# Altium PCB PCB2.PcbDoc
Units mm, origin at the board's own origin, x right, y up, seen from the top; angles counter-clockwise.
Board outline 152.4 x 101.6 mm, 2 copper layers (Top Layer, Bottom Layer); 93 components, 79 nets, 348 pads, 0 vias.
Unrouted connection lines stored in the file: 165.
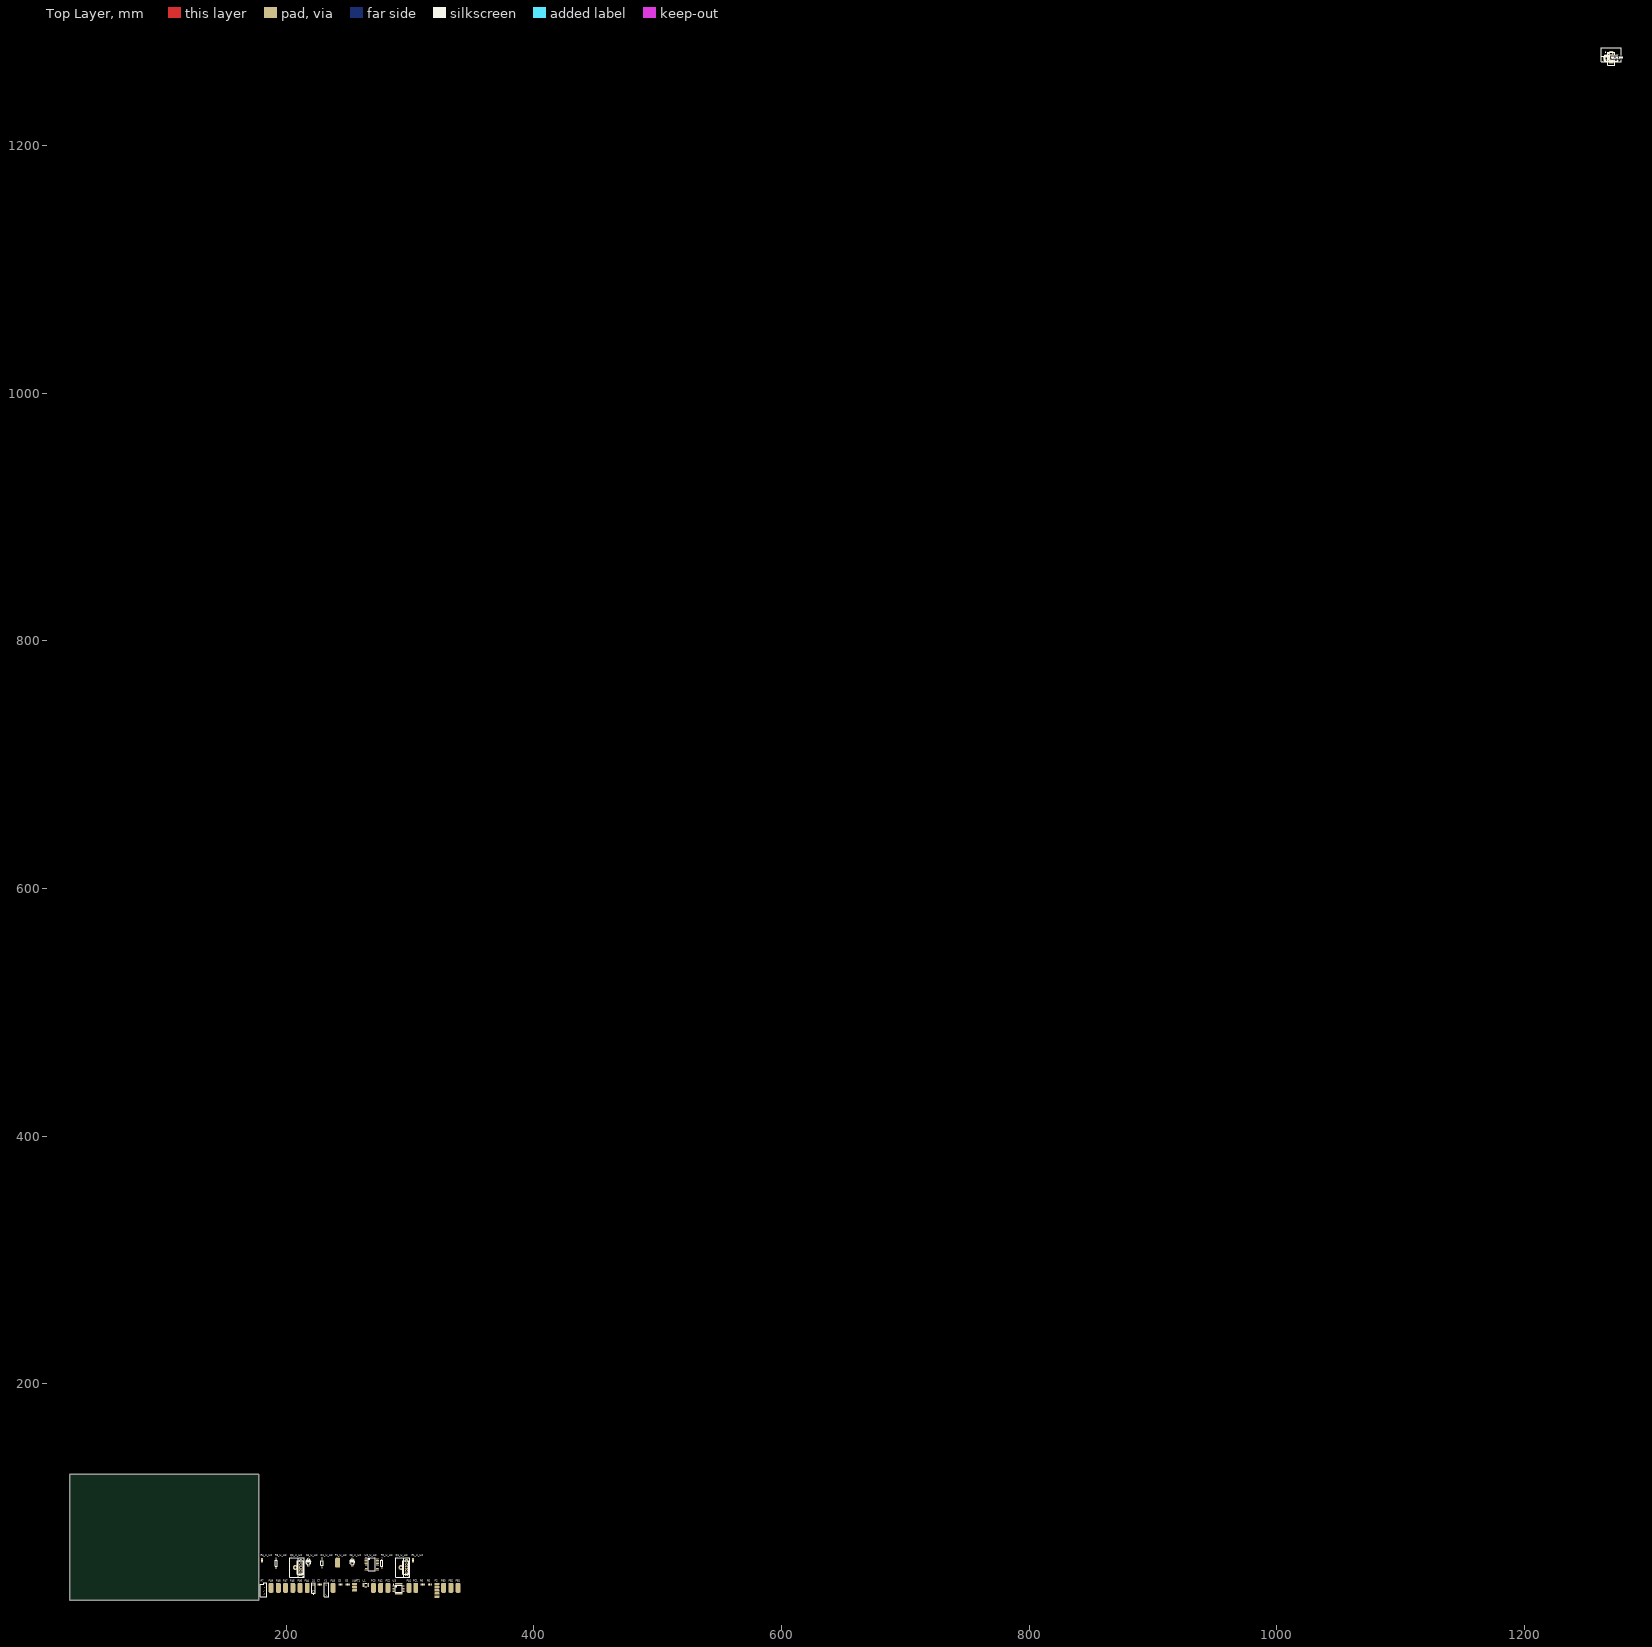
[diagram p0: Top Layer view]
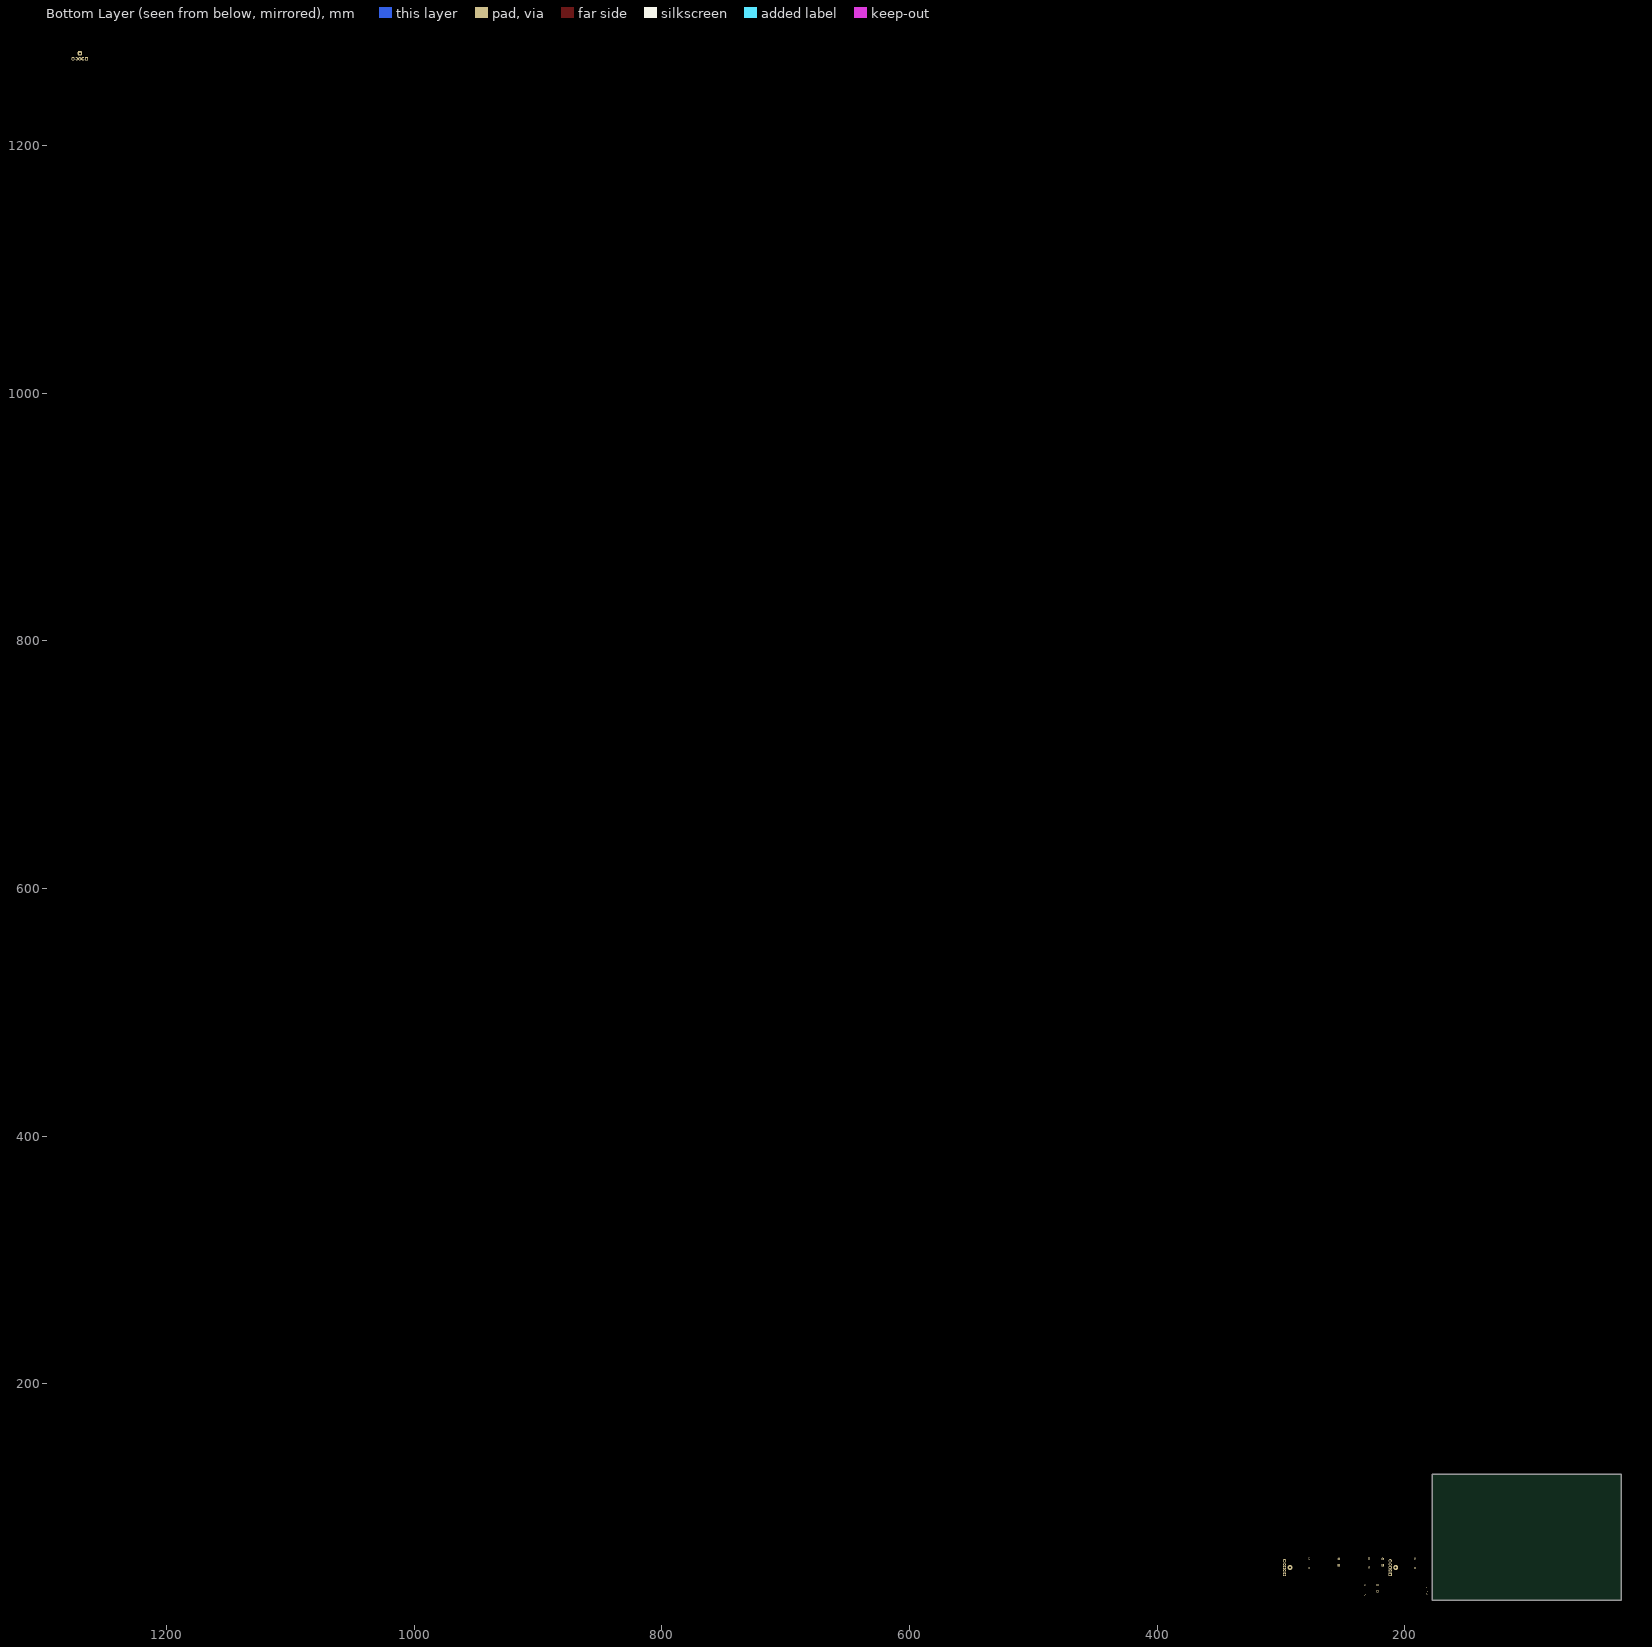
[diagram p1: Bottom Layer view, seen from below]

## Layer stack, top to bottom
Top Solder: solder mask 0.0102, Solder Resist, Dk 3.5
Top Layer: signal copper 0.0356
Dielectric 1: dielectric 0.32, FR-4, Dk 4.8
Bottom Layer: signal copper 0.0356
Bottom Solder: solder mask 0.0102, Solder Resist, Dk 3.5

## Board outline
25.4,25.4 177.8,25.4 177.8,127 25.4,127

## Design rules (kind name [scope] priority, off if disabled: settings)
Clearance [All] p1: gap=0.254
PolygonConnect [All] p1: connectstyle=Relief reliefconductorwidth=0.254 reliefentries=4 polygonreliefangle="90 Angle" airgapwidth=0.254
RoomDefinition U_H6 [InComponentClass('U_H6')] p1: confinementstyle=ConfineIn formatcopy=TRUE lockcomponents=FALSE outline 1261.745,1264.285 1280.541,1264.285 1280.541,1279.017 1261.745,1279.017
RoomDefinition U_H5 [InComponentClass('U_H5')] p2: confinementstyle=ConfineIn formatcopy=TRUE lockcomponents=FALSE outline 1261.745,1264.285 1280.541,1264.285 1280.541,1279.017 1261.745,1279.017
RoomDefinition U_H4 [InComponentClass('U_H4')] p3: confinementstyle=ConfineIn formatcopy=TRUE lockcomponents=FALSE outline 1261.745,1264.285 1280.541,1264.285 1280.541,1279.017 1261.745,1279.017
RoomDefinition U_H3 [InComponentClass('U_H3')] p4: confinementstyle=ConfineIn formatcopy=TRUE lockcomponents=FALSE outline 1261.745,1264.285 1280.541,1264.285 1280.541,1279.017 1261.745,1279.017
RoomDefinition U_H2 [InComponentClass('U_H2')] p5: confinementstyle=ConfineIn formatcopy=TRUE lockcomponents=FALSE outline 178.943,43.434 311.785,43.434 311.785,62.738 178.943,62.738
RoomDefinition U_H1 [InComponentClass('U_H1')] p6: confinementstyle=ConfineIn formatcopy=TRUE lockcomponents=FALSE outline 1261.745,1264.285 1280.033,1264.285 1280.033,1279.017 1261.745,1279.017
RoomDefinition Main [InComponentClass('Main')] p7: confinementstyle=ConfineIn formatcopy=TRUE lockcomponents=FALSE outline 178.943,26.924 341.122,26.924 341.122,42.164 178.943,42.164
RoutingVias [All] p1: holewidth=0.711 width=1.27 viastyle="Through Hole" minholewidth=0.711 minwidth=1.27 maxholewidth=0.711 maxwidth=1.27
SolderMaskExpansion [All] p1: expansion=0.102
Width [All] p1: maxlimit=0.254 minlimit=0.254 preferedwidth=0.254
30 further rules are at their usual default settings.

## Classes and differential pairs
channel class H: U_H1 U_H2 U_H3 U_H4 U_H5 U_H6
component class U_H6: C3_U_H6 C4_U_H6 D1_U_H6 P1_U_H6 Q1_U_H6 Q2_U_H6 R1_U_H6 R2_U_H6 R3_U_H6 R4_U_H6 U2_U_H6
component class U_H5: C3_U_H5 C4_U_H5 D1_U_H5 P1_U_H5 Q1_U_H5 Q2_U_H5 R1_U_H5 R2_U_H5 R3_U_H5 R4_U_H5 U2_U_H5
component class U_H4: C3_U_H4 C4_U_H4 D1_U_H4 P1_U_H4 Q1_U_H4 Q2_U_H4 R1_U_H4 R2_U_H4 R3_U_H4 R4_U_H4 U2_U_H4
component class U_H3: C3_U_H3 C4_U_H3 D1_U_H3 P1_U_H3 Q1_U_H3 Q2_U_H3 R1_U_H3 R2_U_H3 R3_U_H3 R4_U_H3 U2_U_H3
component class U_H2: C3_U_H2 C4_U_H2 D1_U_H2 P1_U_H2 Q1_U_H2 Q2_U_H2 R1_U_H2 R2_U_H2 R3_U_H2 R4_U_H2 U2_U_H2
component class U_H1: C3_U_H1 C4_U_H1 D1_U_H1 P1_U_H1 Q1_U_H1 Q2_U_H1 R1_U_H1 R2_U_H1 R3_U_H1 R4_U_H1 U2_U_H1
component class Main: C5 C6 C7 L1 P2 PA1 PA2 PA3 PA4 PA5 PA6 PA7 PA8 PA9 PB1 PB2 PB3 PC1 PC2 PC3 R5 R6 R7 S1 U3 UART1 Y1

## Components (designator, comment, footprint, x,y, rotation, side; value= is the part's Value field where it differs from the comment)
C3_U_H1 "Cap Pol1" CAPR-Small 1269.987,1269.987 r0 top (schematic designator C3)
C3_U_H2 "Cap Pol1" CAPR-Small 253.238,56.134 r90 top (schematic designator C3)
C3_U_H3 "Cap Pol1" CAPR-Small 1269.987,1269.987 r0 top (schematic designator C3)
C3_U_H4 "Cap Pol1" CAPR-Small 1269.987,1269.987 r0 top (schematic designator C3)
C3_U_H5 "Cap Pol1" CAPR-Small 1269.987,1269.987 r0 top (schematic designator C3)
C3_U_H6 "Cap Pol1" CAPR-Small 1269.987,1269.987 r0 top (schematic designator C3)
C4_U_H1 "Cap Pol1" CAPR-Small 1269.987,1269.987 r0 top (schematic designator C4)
C4_U_H2 "Cap Pol1" CAPR-Small 217.932,56.134 r90 top (schematic designator C4)
C4_U_H3 "Cap Pol1" CAPR-Small 1269.987,1269.987 r0 top (schematic designator C4)
C4_U_H4 "Cap Pol1" CAPR-Small 1269.987,1269.987 r0 top (schematic designator C4)
C4_U_H5 "Cap Pol1" CAPR-Small 1269.987,1269.987 r0 top (schematic designator C4)
C4_U_H6 "Cap Pol1" CAPR-Small 1269.987,1269.987 r0 top (schematic designator C4)
C5 "Cap" 6-0805_M 243.967,38.1 r0 top
C6 "Cap" 6-0805_M 249.682,38.1 r0 top
C7 "Cap" 6-0805_M 227.076,38.1 r0 top
D1_U_H1 "Diode 15822" DO-35 1269.987,1269.987 r0 top (schematic designator D1)
D1_U_H2 "Diode 15822" DO-35 228.854,55.372 r90 top (schematic designator D1)
D1_U_H3 "Diode 15822" DO-35 1269.987,1269.987 r0 top (schematic designator D1)
D1_U_H4 "Diode 15822" DO-35 1269.987,1269.987 r0 top (schematic designator D1)
D1_U_H5 "Diode 15822" DO-35 1269.987,1269.987 r0 top (schematic designator D1)
D1_U_H6 "Diode 15822" DO-35 1269.987,1269.987 r0 top (schematic designator D1)
L1 "Inductor" INDC4532 264.414,37.592 r0 top
P1_U_H1 "Header TOP 1" PIN1 1269.987,1269.987 r0 top (schematic designator P1)
P1_U_H2 "Header TOP 1" PIN1 241.554,55.626 r0 top (schematic designator P1)
P1_U_H3 "Header TOP 1" PIN1 1269.987,1269.987 r0 top (schematic designator P1)
P1_U_H4 "Header TOP 1" PIN1 1269.987,1269.987 r0 top (schematic designator P1)
P1_U_H5 "Header TOP 1" PIN1 1269.987,1269.987 r0 top (schematic designator P1)
P1_U_H6 "Header TOP 1" PIN1 1269.987,1269.987 r0 top (schematic designator P1)
P2 "Header TOP 5" PIN_TOP_SMALL_5 321.691,28.194 r90 top
PA1 "Header TOP 1" PIN1 299.212,35.306 r0 top
PA2 "Header TOP 1" PIN1 276.352,35.306 r0 top
PA3 "Header TOP 1" PIN1 237.871,35.306 r0 top
PA4 "Header TOP 1" PIN1 217.043,35.306 r0 top
PA5 "Header TOP 1" PIN1 205.359,35.306 r0 top
PA6 "Header TOP 1" PIN1 211.201,35.306 r0 top
PA7 "Header TOP 1" PIN1 199.517,35.306 r0 top
PA8 "Header TOP 1" PIN1 193.675,35.306 r0 top
PA9 "Header TOP 1" PIN1 187.833,35.306 r0 top
PB1 "Header TOP 1" PIN1 338.836,35.306 r0 top
PB2 "Header TOP 1" PIN1 332.994,35.306 r0 top
PB3 "Header TOP 1" PIN1 327.152,35.306 r0 top
PC1 "Header TOP 1" PIN1 304.673,35.306 r0 top
PC2 "Header TOP 1" PIN1 282.194,35.306 r0 top
PC3 "Header TOP 1" PIN1 270.51,35.306 r0 top
Q1_U_H1 "NMOSFET-UNIVERSAL" NMOSFET-UNIVERSAL 1269.987,1269.987 r0 top (schematic designator Q1)
Q1_U_H2 "NMOSFET-UNIVERSAL" NMOSFET-UNIVERSAL 297.18,51.689 r90 top (schematic designator Q1)
Q1_U_H3 "NMOSFET-UNIVERSAL" NMOSFET-UNIVERSAL 1269.987,1269.987 r0 top (schematic designator Q1)
Q1_U_H4 "NMOSFET-UNIVERSAL" NMOSFET-UNIVERSAL 1269.987,1269.987 r0 top (schematic designator Q1)
Q1_U_H5 "NMOSFET-UNIVERSAL" NMOSFET-UNIVERSAL 1269.987,1269.987 r0 top (schematic designator Q1)
Q1_U_H6 "NMOSFET-UNIVERSAL" NMOSFET-UNIVERSAL 1269.987,1269.987 r0 top (schematic designator Q1)
Q2_U_H1 "NMOSFET-UNIVERSAL" NMOSFET-UNIVERSAL 1269.987,1269.987 r0 top (schematic designator Q2)
Q2_U_H2 "NMOSFET-UNIVERSAL" NMOSFET-UNIVERSAL 211.836,51.689 r90 top (schematic designator Q2)
Q2_U_H3 "NMOSFET-UNIVERSAL" NMOSFET-UNIVERSAL 1269.987,1269.987 r0 top (schematic designator Q2)
Q2_U_H4 "NMOSFET-UNIVERSAL" NMOSFET-UNIVERSAL 1269.987,1269.987 r0 top (schematic designator Q2)
Q2_U_H5 "NMOSFET-UNIVERSAL" NMOSFET-UNIVERSAL 1269.987,1269.987 r0 top (schematic designator Q2)
Q2_U_H6 "NMOSFET-UNIVERSAL" NMOSFET-UNIVERSAL 1269.987,1269.987 r0 top (schematic designator Q2)
R1_U_H1 "Resistor" 6-0805_M 1269.987,1269.987 r0 top (schematic designator R1)
R1_U_H2 "Resistor" 6-0805_M 302.514,57.531 r90 top (schematic designator R1)
R1_U_H3 "Resistor" 6-0805_M 1269.987,1269.987 r0 top (schematic designator R1)
R1_U_H4 "Resistor" 6-0805_M 1269.987,1269.987 r0 top (schematic designator R1)
R1_U_H5 "Resistor" 6-0805_M 1269.987,1269.987 r0 top (schematic designator R1)
R1_U_H6 "Resistor" 6-0805_M 1269.987,1269.987 r0 top (schematic designator R1)
R2_U_H1 "Res1" AXIAL-0.3 1269.987,1269.987 r0 top (schematic designator R2)
R2_U_H2 "Res1" AXIAL-0.3 277.241,55.118 r90 top (schematic designator R2)
R2_U_H3 "Res1" AXIAL-0.3 1269.987,1269.987 r0 top (schematic designator R2)
R2_U_H4 "Res1" AXIAL-0.3 1269.987,1269.987 r0 top (schematic designator R2)
R2_U_H5 "Res1" AXIAL-0.3 1269.987,1269.987 r0 top (schematic designator R2)
R2_U_H6 "Res1" AXIAL-0.3 1269.987,1269.987 r0 top (schematic designator R2)
R3_U_H1 "Res1" AXIAL-0.3 1269.987,1269.987 r0 top (schematic designator R3)
R3_U_H2 "Res1" AXIAL-0.3 191.897,55.118 r90 top (schematic designator R3)
R3_U_H3 "Res1" AXIAL-0.3 1269.987,1269.987 r0 top (schematic designator R3)
R3_U_H4 "Res1" AXIAL-0.3 1269.987,1269.987 r0 top (schematic designator R3)
R3_U_H5 "Res1" AXIAL-0.3 1269.987,1269.987 r0 top (schematic designator R3)
R3_U_H6 "Res1" AXIAL-0.3 1269.987,1269.987 r0 top (schematic designator R3)
R4_U_H1 "Resistor" 6-0805_M 1269.987,1269.987 r0 top (schematic designator R4)
R4_U_H2 "Resistor" 6-0805_M 180.467,57.531 r90 top (schematic designator R4)
R4_U_H3 "Resistor" 6-0805_M 1269.987,1269.987 r0 top (schematic designator R4)
R4_U_H4 "Resistor" 6-0805_M 1269.987,1269.987 r0 top (schematic designator R4)
R4_U_H5 "Resistor" 6-0805_M 1269.987,1269.987 r0 top (schematic designator R4)
R4_U_H6 "Resistor" 6-0805_M 1269.987,1269.987 r0 top (schematic designator R4)
R5 "Resistor" 6-0805_M 316.103,38.1 r0 top
R6 "Resistor" 6-0805_M 310.261,38.1 r0 top
R7 "RPot" VR5 181.737,33.02 r90 top
S1 "SW-PB" SPST-2 222.123,35.052 r90 top
U2_U_H1 "IR2110S" SOIC16_N 1269.987,1269.987 r0 top (schematic designator U2)
U2_U_H2 "IR2110S" SOIC16_N 269.113,54.229 r0 top (schematic designator U2)
U2_U_H3 "IR2110S" SOIC16_N 1269.987,1269.987 r0 top (schematic designator U2)
U2_U_H4 "IR2110S" SOIC16_N 1269.987,1269.987 r0 top (schematic designator U2)
U2_U_H5 "IR2110S" SOIC16_N 1269.987,1269.987 r0 top (schematic designator U2)
U2_U_H6 "IR2110S" SOIC16_N 1269.987,1269.987 r0 top (schematic designator U2)
U3 "STM32F100C8T6B" TQFP48_L 290.83,34.544 r0 top
UART1 "Header TOP 3" PIN_TOP_SMALL_3 255.27,33.274 r90 top
Y1 "XTAL" RAD-0.3 232.537,33.655 r90 top

## Footprints (in the part's own frame and the unit in brackets; to place one, negate y for a bottom-side part, rotate by r counter-clockwise, add the part's x,y. Pads: shape width x height; smd on the part's side, far side on the other; paste and mask are expansions set on the pad)
6-0805_M [mm] "Chip Resistor, Body 2.0x1.2mm, IPC Low Density"
  rect 1.4x1.5 smd: 1(-1,0) 2(1,0)
  silkscreen extent 0,-0.65 0,0.65, body extent -1.07,-0.7 1.07,0.7, height 0.7
AXIAL-0.3 [mm] "Axial Device, Thru-Hole; 2 Leads; 0.3 in Pin Spacing"
  round 1.4 hole 0.85: 1(-3.81,0) 2(3.81,0)
  silkscreen extent -2.77,-0.76 2.77,0.76
CAPR-Small [mm] "Capacitor; 2 Leads"
  rect 2x2 hole 0.8: 1(-2.5,0)
  round 2 hole 0.8: 2(2.5,0)
  silkscreen extent -1.69,-2 1.82,2
DO-35 [mm] "Diode, Axial; Body 3.8 x 1.9 mm (LxDia. max), Lead Dia. 0.53 mm (max)"
  round 1.5 hole 0.9: 1(-3.55,0)
  rect 1.5x1.5 hole 0.9: 2(3.55,0)
  silkscreen extent -1.95,-0.95 2.05,0.95
INDC4532 [mm] "Chip Inductor, Body 4.5x3.2mm, IPC High Density"
  rect 1.4x3.3 smd: 1(-1.9,0) 2(1.9,0)
  silkscreen extent -0.8,-1.55 0.8,1.55, body extent -2.4,-1.7 2.4,1.7, height 0.55
NMOSFET-UNIVERSAL [mm] "TO, Thru-Hole, Vertical, Heatsink Mounted; 3 In-Line Leads; Pitch 2.54 mm"
  rect 2.7x2.7 hole 1.6: 1(-5.44,-0.008)
  round 2.8 hole 1.6: 2(0.01,-0.008)
  round 2.7 hole 1.6: 3(5.46,-0.008)
  rect 1.6x2.7 hole 1: 4(-2.54,0)
  oval 1.6x2.7 hole 1: 5(2.54,0)
  round 4 hole 1.6: 6(0,4.445)
  silkscreen extent -7.94,-2.61 7.96,8.76, body extent -7.94,-2.61 7.96,2.9, height 24.6
PIN1 [mm] "Connector; Plug"
  rrect50% 4x8 smd: 1(0,0)
PIN_TOP_SMALL_3 [mm] "Connector; Plug"
  rrect50% 2x4 smd: 1(0,0) 2(2.54,0) 3(5.08,0)
PIN_TOP_SMALL_5 [mm] "Connector; Plug"
  rrect50% 2x4 smd: 1(0,0) 2(2.54,0) 3(5.08,0) 4(7.62,0) 5(10.16,0)
RAD-0.3 [mm] "Radial Cap, Thru-Hole; 2 Leads; 0.3 in Pin Spacing"
  round 1.2 hole 0.7: 1(-3.81,0) 2(3.81,0)
  silkscreen extent -5.71,-1.91 5.71,1.91
SOIC16_N [mm] "16-Pin Small Outline Integrated Circuit 1.27 mm Pitch, IPC Medium Density"
  oval 2.3x0.6 smd: 1(-4.55,4.445) 2(-4.55,3.175) 3(-4.55,1.905) 4(-4.55,0.635) 5(-4.55,-0.635) 6(-4.55,-1.905) 7(-4.55,-3.175) 8(-4.55,-4.445) 9(4.55,-4.445) 10(4.55,-3.175) 11(4.55,-1.905) 12(4.55,-0.635) 13(4.55,0.635) 14(4.55,1.905) 15(4.55,3.175) 16(4.55,4.445)
  silkscreen extent -4.67,-5.25 3,5.42, body extent -3.75,-5.15 3.75,5.15, height 2.65
SPST-2 [mm] "Switch; 2 Leads"
  rect 1.85x1.85 hole 1.1: 1(-2.54,0)
  round 1.85 hole 1.1: 2(2.54,0)
  silkscreen extent -4.89,-1.27 4.28,1.27
TQFP48_L [mm] "48-Pin Thin Quad Flat Pack 0.5 mm Pitch, IPC High Density"
  oval 1.55x0.25 smd: 1(-4.025,2.75) 2(-4.025,2.25) 3(-4.025,1.75) 4(-4.025,1.25) 5(-4.025,0.75) 6(-4.025,0.25) 7(-4.025,-0.25) 8(-4.025,-0.75) 9(-4.025,-1.25) 10(-4.025,-1.75) 11(-4.025,-2.25) 12(-4.025,-2.75) 25(4.025,-2.75) 26(4.025,-2.25) 27(4.025,-1.75) 28(4.025,-1.25) 29(4.025,-0.75) 30(4.025,-0.25) 31(4.025,0.25) 32(4.025,0.75) 33(4.025,1.25) 34(4.025,1.75) 35(4.025,2.25) 36(4.025,2.75)
  oval 0.25x1.55 smd: 13(-2.75,-4.025) 14(-2.25,-4.025) 15(-1.75,-4.025) 16(-1.25,-4.025) 17(-0.75,-4.025) 18(-0.25,-4.025) 19(0.25,-4.025) 20(0.75,-4.025) 21(1.25,-4.025) 22(1.75,-4.025) 23(2.25,-4.025) 24(2.75,-4.025) 37(2.75,4.025) 38(2.25,4.025) 39(1.75,4.025) 40(1.25,4.025) 41(0.75,4.025) 42(0.25,4.025) 43(-0.25,4.025) 44(-0.75,4.025) 45(-1.25,4.025) 46(-1.75,4.025) 47(-2.25,4.025) 48(-2.75,4.025)
  silkscreen extent -4.15,-2.85 2.85,3.55, body extent -3.5,-3.5 3.5,3.5, height 1.6
VR5 [mm] "Thru-Hole; 3 Leads"
  rect 1.2x1.2 hole 0.7: 1(-2.54,0)
  round 1.2 hole 0.7: 2(0,0) 3(2.54,0)
  silkscreen extent -5.08,-2.54 6.35,2.54

## Part data
C3_U_H1 C3_U_H2 C3_U_H3 C3_U_H4 C3_U_H5 C3_U_H6 C4_U_H1 C4_U_H2 C4_U_H3 C4_U_H4 C4_U_H5 C4_U_H6: "Polarized Capacitor (Radial)"
C5 C6 C7: "Capacitor"
D1_U_H1 D1_U_H2 D1_U_H3 D1_U_H4 D1_U_H5 D1_U_H6: library part "Diode 1N4448", "High Conductance Fast Diode"
P1_U_H1 P1_U_H2 P1_U_H3 P1_U_H4 P1_U_H5 P1_U_H6 P2 PA1 PA2 PA3 PA4 PA5 PA6 PA7 PA8 PA9 PB1 PB2 PB3 PC1 PC2 PC3 UART1: "Header, 1Pin"
Q1_U_H1 Q1_U_H2 Q1_U_H3 Q1_U_H4 Q1_U_H5 Q1_U_H6 Q2_U_H1 Q2_U_H2 Q2_U_H3 Q2_U_H4 Q2_U_H5 Q2_U_H6: "N-Channel MOSFET"
R2_U_H1 R2_U_H2 R2_U_H3 R2_U_H4 R2_U_H5 R2_U_H6 R3_U_H1 R3_U_H2 R3_U_H3 R3_U_H4 R3_U_H5 R3_U_H6: "Resistor"
R7: "Potentiometer"
S1: "Switch"
U2_U_H1 U2_U_H2 U2_U_H3 U2_U_H4 U2_U_H5 U2_U_H6: "High and Low Side Driver"
U3: "STM32 ARM-based 32-bit MCU with 32 Kbytes Flash, 48-pin LQFP, Industrial Temperature"
Y1: "Crystal Oscillator"

## Nets (pads, with @x,y where several pads share a name; then routed paths per layer and width w, separated by ;. In a path a pad name is that pad's centre, name@x,y a point inside that pad or via, vN(x,y) a via of type N, cw(c..) or ccw(c..) an arc to the next point about the centre after c; other vN are vias at no path point)
12V: C4_U_H1.1 C4_U_H2.1 C4_U_H3.1 C4_U_H4.1 C4_U_H5.1 C4_U_H6.1 D1_U_H1.1 D1_U_H2.1 D1_U_H3.1 D1_U_H4.1 D1_U_H5.1 D1_U_H6.1 U2_U_H1.3 U2_U_H2.3 U2_U_H3.3 U2_U_H4.3 U2_U_H5.3 U2_U_H6.3
GND: C4_U_H1.2 C4_U_H2.2 C4_U_H3.2 C4_U_H4.2 C4_U_H5.2 C4_U_H6.2 C5.2 C6.1 C7.1 P2.3 Q2_U_H1.3 Q2_U_H1.5 Q2_U_H2.3 Q2_U_H2.5 Q2_U_H3.3 Q2_U_H3.5 Q2_U_H4.3 Q2_U_H4.5 Q2_U_H5.3 Q2_U_H5.5 Q2_U_H6.3 Q2_U_H6.5 R7.2 S1.1 U2_U_H1.2 U2_U_H1.15 U2_U_H2.2 U2_U_H2.15 U2_U_H3.2 U2_U_H3.15 U2_U_H4.2 U2_U_H4.15 U2_U_H5.2 U2_U_H5.15 U2_U_H6.2 U2_U_H6.15 U3.8 U3.23 U3.35 U3.47 UART1.3
NetC3_U_H1_1: C3_U_H1.1 D1_U_H1.2 U2_U_H1.7
NetC3_U_H1_2: C3_U_H1.2 P1_U_H1.1 Q1_U_H1.3 Q1_U_H1.5 Q2_U_H1.2 U2_U_H1.6
NetC3_U_H2_1: C3_U_H2.1 D1_U_H2.2 U2_U_H2.7
NetC3_U_H2_2: C3_U_H2.2 P1_U_H2.1 Q1_U_H2.3 Q1_U_H2.5 Q2_U_H2.2 U2_U_H2.6
NetC3_U_H3_1: C3_U_H3.1 D1_U_H3.2 U2_U_H3.7
NetC3_U_H3_2: C3_U_H3.2 P1_U_H3.1 Q1_U_H3.3 Q1_U_H3.5 Q2_U_H3.2 U2_U_H3.6
NetC3_U_H4_1: C3_U_H4.1 D1_U_H4.2 U2_U_H4.7
NetC3_U_H4_2: C3_U_H4.2 P1_U_H4.1 Q1_U_H4.3 Q1_U_H4.5 Q2_U_H4.2 U2_U_H4.6
NetC3_U_H5_1: C3_U_H5.1 D1_U_H5.2 U2_U_H5.7
NetC3_U_H5_2: C3_U_H5.2 P1_U_H5.1 Q1_U_H5.3 Q1_U_H5.5 Q2_U_H5.2 U2_U_H5.6
NetC3_U_H6_1: C3_U_H6.1 D1_U_H6.2 U2_U_H6.7
NetC3_U_H6_2: C3_U_H6.2 P1_U_H6.1 Q1_U_H6.3 Q1_U_H6.5 Q2_U_H6.2 U2_U_H6.6
NetC5_1: C5.1 U3.5 Y1.1
NetC6_2: C6.2 U3.6 Y1.2
NetC7_2: C7.2 L1.1 U3.9
NetP2_2: P2.2 U3.37
NetP2_4: P2.4 U3.34
NetPA1_1: PA1.1 U3.33
NetPA2_1: PA2.1 U3.32
NetPA3_1: PA3.1 U3.29
NetPA4_1: PA4.1 U3.11
NetPA5_1: PA5.1 U3.12
NetPA6_1: PA6.1 U3.13
NetPA7_1: PA7.1 U3.14
NetPA8_1: PA8.1 U3.15
NetPA9_1: PA9.1 U3.16
NetPB1_1: PB1.1 U3.43
NetPB2_1: PB2.1 U3.45
NetPB3_1: PB3.1 U3.46
NetPC1_1: PC1.1 U3.2
NetPC2_1: PC2.1 U3.3
NetPC3_1: PC3.1 U3.4
NetQ1_U_H1_1: Q1_U_H1.1 Q1_U_H1.4 R1_U_H1.1 R2_U_H1.2
NetQ1_U_H2_1: Q1_U_H2.1 Q1_U_H2.4 R1_U_H2.1 R2_U_H2.2
NetQ1_U_H3_1: Q1_U_H3.1 Q1_U_H3.4 R1_U_H3.1 R2_U_H3.2
NetQ1_U_H4_1: Q1_U_H4.1 Q1_U_H4.4 R1_U_H4.1 R2_U_H4.2
NetQ1_U_H5_1: Q1_U_H5.1 Q1_U_H5.4 R1_U_H5.1 R2_U_H5.2
NetQ1_U_H6_1: Q1_U_H6.1 Q1_U_H6.4 R1_U_H6.1 R2_U_H6.2
NetQ2_U_H1_1: Q2_U_H1.1 Q2_U_H1.4 R3_U_H1.2 R4_U_H1.1
NetQ2_U_H2_1: Q2_U_H2.1 Q2_U_H2.4 R3_U_H2.2 R4_U_H2.1
NetQ2_U_H3_1: Q2_U_H3.1 Q2_U_H3.4 R3_U_H3.2 R4_U_H3.1
NetQ2_U_H4_1: Q2_U_H4.1 Q2_U_H4.4 R3_U_H4.2 R4_U_H4.1
NetQ2_U_H5_1: Q2_U_H5.1 Q2_U_H5.4 R3_U_H5.2 R4_U_H5.1
NetQ2_U_H6_1: Q2_U_H6.1 Q2_U_H6.4 R3_U_H6.2 R4_U_H6.1
NetR1_U_H1_2: R1_U_H1.2 R2_U_H1.1 U2_U_H1.8
NetR1_U_H2_2: R1_U_H2.2 R2_U_H2.1 U2_U_H2.8
NetR1_U_H3_2: R1_U_H3.2 R2_U_H3.1 U2_U_H3.8
NetR1_U_H4_2: R1_U_H4.2 R2_U_H4.1 U2_U_H4.8
NetR1_U_H5_2: R1_U_H5.2 R2_U_H5.1 U2_U_H5.8
NetR1_U_H6_2: R1_U_H6.2 R2_U_H6.1 U2_U_H6.8
NetR3_U_H1_1: R3_U_H1.1 R4_U_H1.2 U2_U_H1.1
NetR3_U_H2_1: R3_U_H2.1 R4_U_H2.2 U2_U_H2.1
NetR3_U_H3_1: R3_U_H3.1 R4_U_H3.2 U2_U_H3.1
NetR3_U_H4_1: R3_U_H4.1 R4_U_H4.2 U2_U_H4.1
NetR3_U_H5_1: R3_U_H5.1 R4_U_H5.2 U2_U_H5.1
NetR3_U_H6_1: R3_U_H6.1 R4_U_H6.2 U2_U_H6.1
NetR5_1: R5.1 U3.44
NetS1_2: S1.2 U3.10
NetU2_U_H1_12: U2_U_H1.12 U3.42
NetU2_U_H1_14: U2_U_H1.14 U3.41
NetU2_U_H2_12: U2_U_H2.12 U3.40
NetU2_U_H2_14: U2_U_H2.14 U3.39
NetU2_U_H3_12: U2_U_H3.12 U3.22
NetU2_U_H3_14: U2_U_H3.14 U3.21
NetU2_U_H4_12: U2_U_H4.12 U3.28
NetU2_U_H4_14: U2_U_H4.14 U3.27
NetU2_U_H5_12: U2_U_H5.12 U3.26
NetU2_U_H5_14: U2_U_H5.14 U3.25
NetU2_U_H6_12: U2_U_H6.12 U3.20
NetU2_U_H6_14: U2_U_H6.14 U3.19
NetU3_30: U3.30 UART1.2
NetU3_31: U3.31 UART1.1
NRST: P2.5 R6.2 U3.7
PWR: Q1_U_H1.2 Q1_U_H2.2 Q1_U_H3.2 Q1_U_H4.2 Q1_U_H5.2 Q1_U_H6.2
SD: U2_U_H1.13 U2_U_H2.13 U2_U_H3.13 U2_U_H4.13 U2_U_H5.13 U2_U_H6.13 U3.18
SPEED: R7.3 U3.17
VCC: L1.2 P2.1 R5.2 R6.1 R7.1 U2_U_H1.11 U2_U_H2.11 U2_U_H3.11 U2_U_H4.11 U2_U_H5.11 U2_U_H6.11 U3.1 U3.24 U3.36 U3.48
pads on no net: Q1_U_H1.6 Q1_U_H2.6 Q1_U_H3.6 Q1_U_H4.6 Q1_U_H5.6 Q1_U_H6.6 Q2_U_H1.6 Q2_U_H2.6 Q2_U_H3.6 Q2_U_H4.6 Q2_U_H5.6 Q2_U_H6.6 U2_U_H1.4 U2_U_H1.5 U2_U_H1.9 U2_U_H1.10 U2_U_H1.16 U2_U_H2.4 U2_U_H2.5 U2_U_H2.9 U2_U_H2.10 U2_U_H2.16 U2_U_H3.4 U2_U_H3.5 U2_U_H3.9 U2_U_H3.10 U2_U_H3.16 U2_U_H4.4 U2_U_H4.5 U2_U_H4.9 U2_U_H4.10 U2_U_H4.16 U2_U_H5.4 U2_U_H5.5 U2_U_H5.9 U2_U_H5.10 U2_U_H5.16 U2_U_H6.4 U2_U_H6.5 U2_U_H6.9 U2_U_H6.10 U2_U_H6.16 U3.38